# Altium PCB PCB3.PcbDoc
Units mil, origin at the board's own origin, x right, y up, seen from the top; angles counter-clockwise.
Board outline 2245 x 1690 mil, 2 copper layers (Top Layer, Bottom Layer); 6 components, 4 nets, 17 pads, 0 vias.
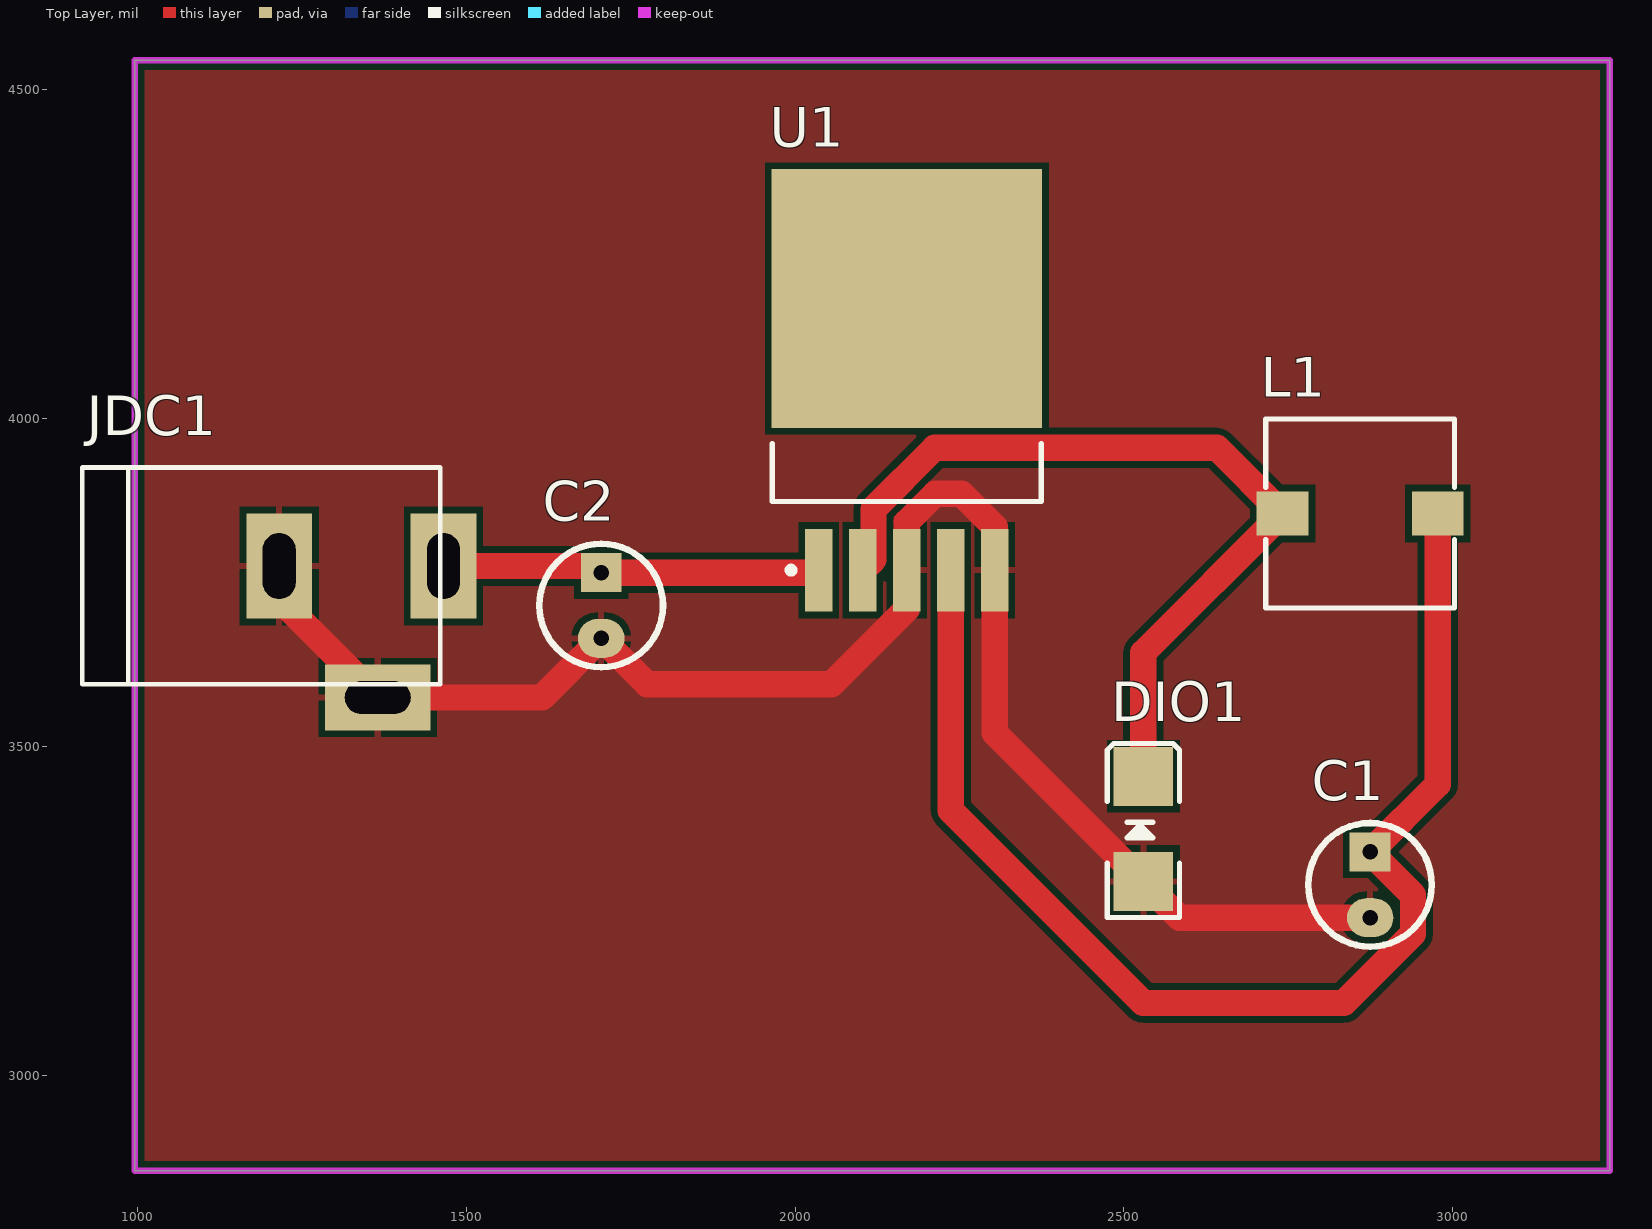
[diagram p0: Top Layer view]
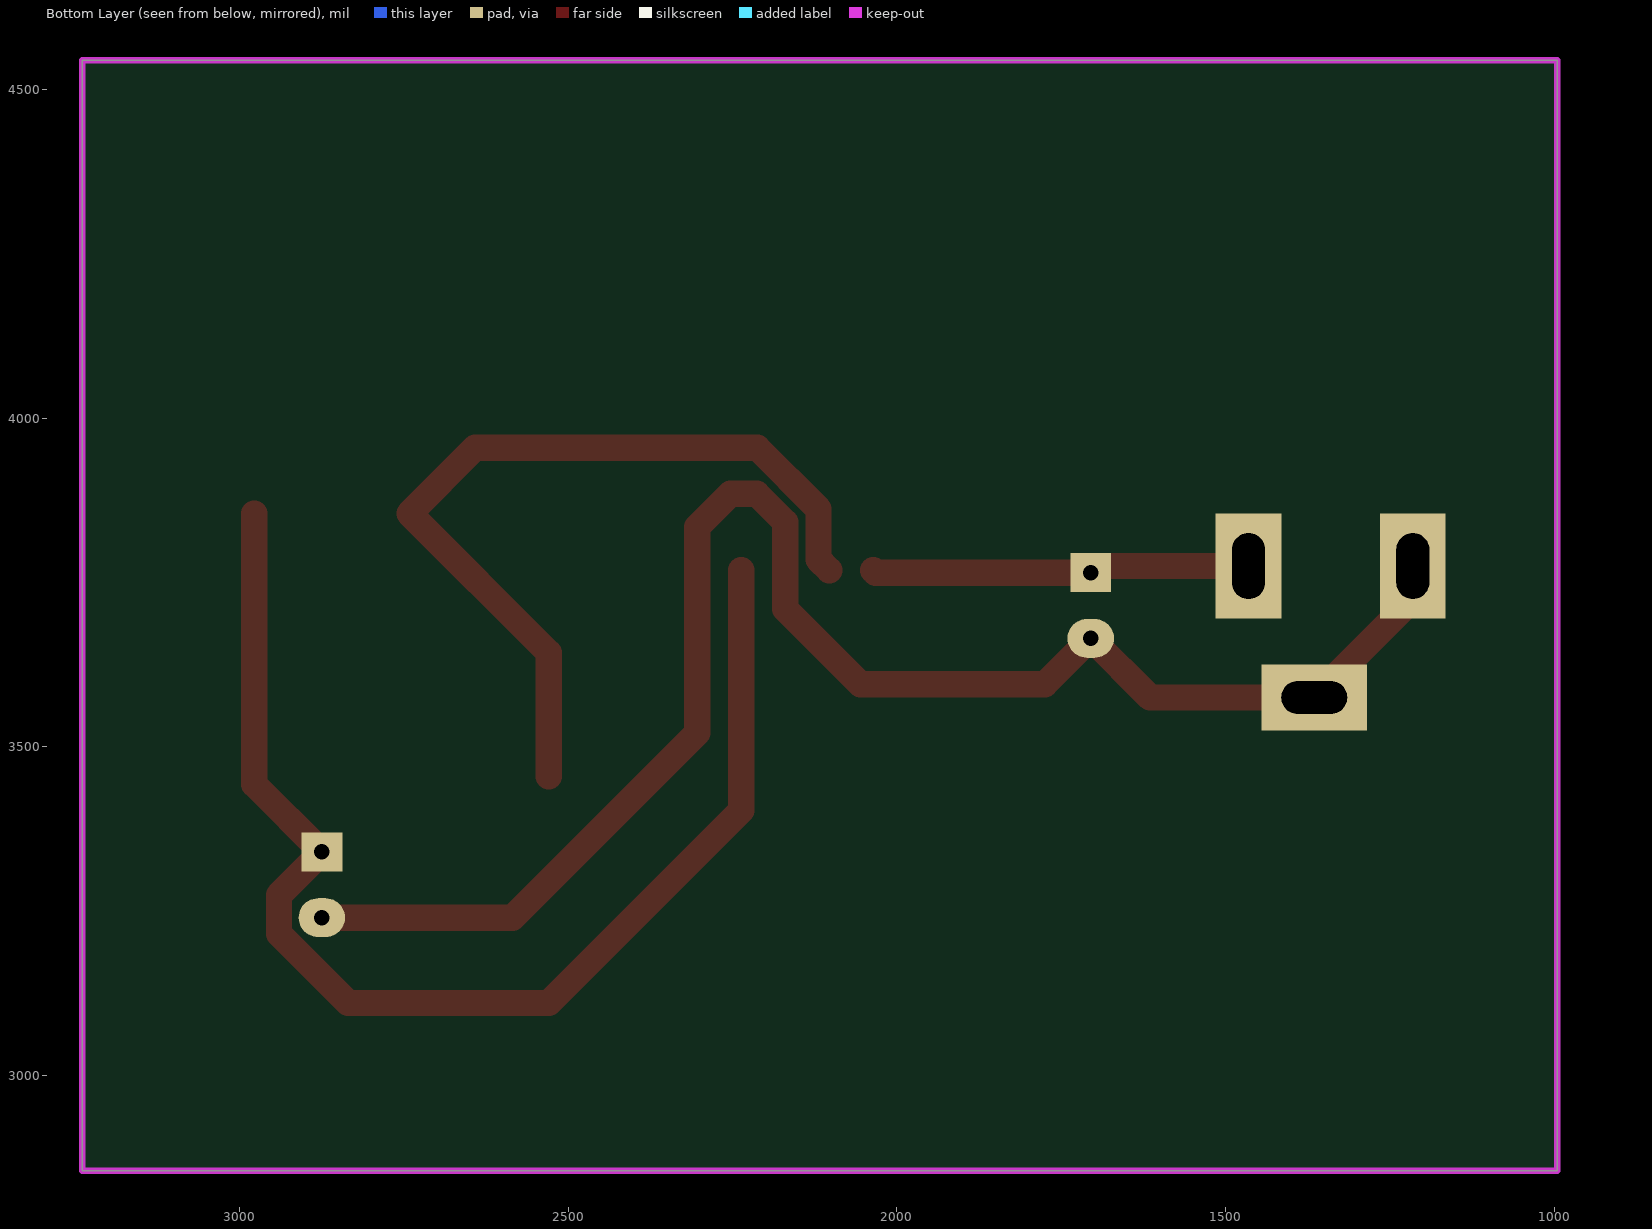
[diagram p1: Bottom Layer view, seen from below]
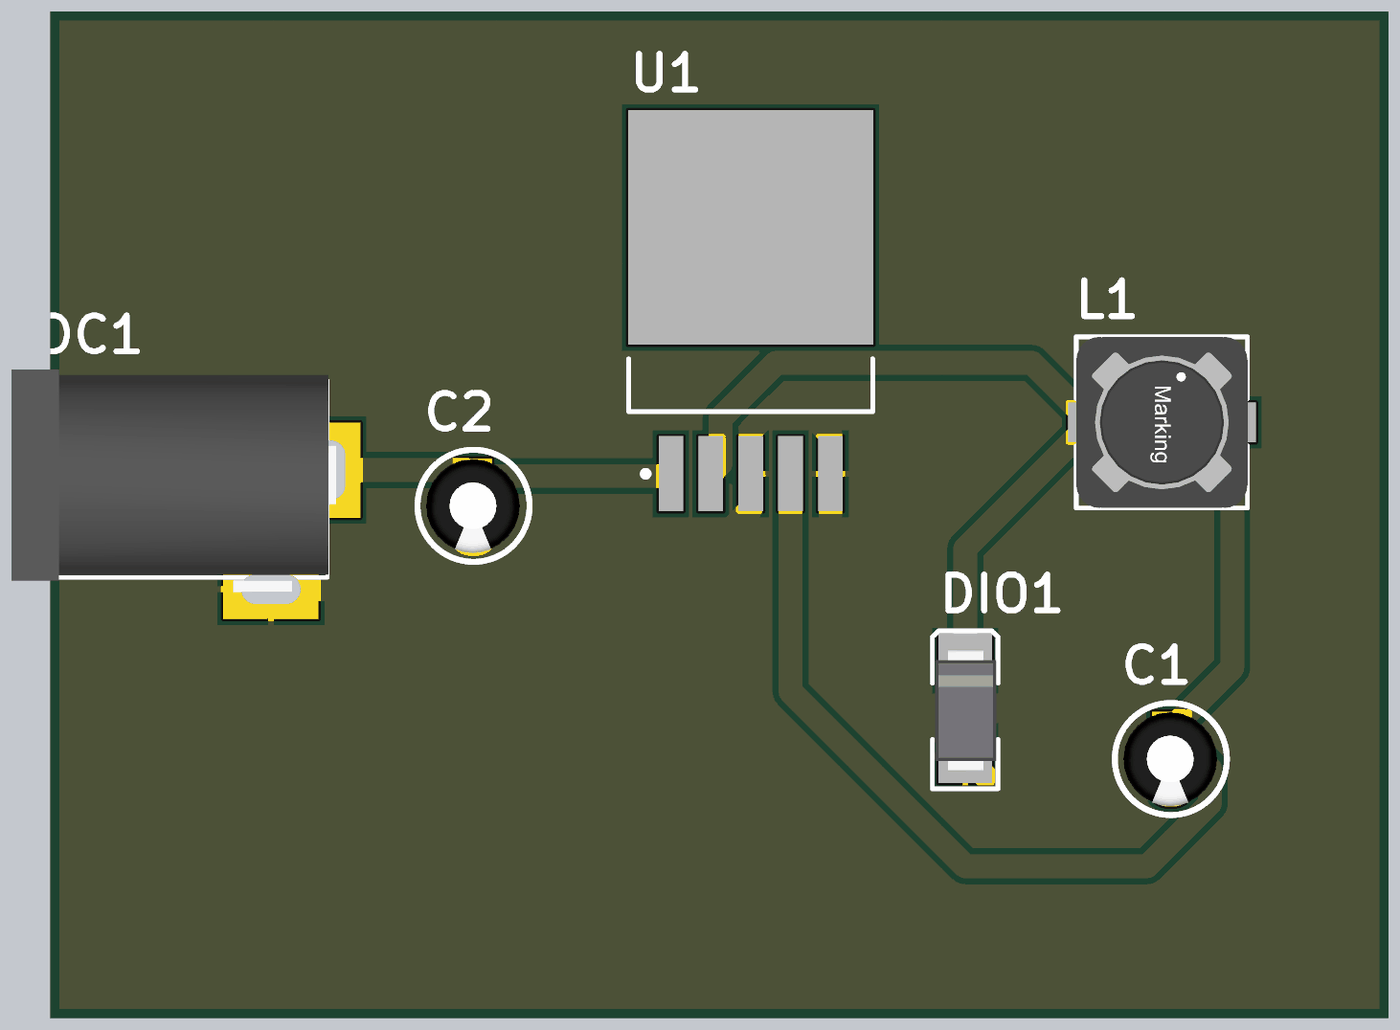
[diagram p2: 3D render of the assembled board from above, using the file's embedded part models]

## Layer stack, top to bottom
Top Solder: solder mask 0.4, Solder Resist, Dk 3.5
Top Layer: signal copper 1.4
Dielectric 1: dielectric 12.6, FR-4, Dk 4.8
Bottom Layer: signal copper 1.4
Bottom Solder: solder mask 0.4, Solder Resist, Dk 3.5

## Board outline
995,2855 3240,2855 3240,4545 995,4545

## Design rules (kind name [scope] priority, off if disabled: settings)
Clearance [All] p1: gap=10 ignorepadtopadclearanceinfootprint=TRUE
PolygonConnect [All] p1: connectstyle=Relief reliefconductorwidth=10 reliefentries=4 polygonreliefangle="90 Angle" airgapwidth=10
RoutingVias [All] p1: holewidth=28 width=50 viastyle="Through Hole" minholewidth=28 minwidth=50 maxholewidth=28 maxwidth=50
SolderMaskExpansion [All] p1: expansion=4
Width [All] p1: maxlimit=40 minlimit=15 preferedwidth=30
30 further rules are at their usual default settings.

## Components (designator, comment, footprint, x,y, rotation, side; value= is the part's Value field where it differs from the comment)
C1 "CAP-ALU-DIP" CA-ALU-2.54 2875,3290 r270 top value=104
C2 "CAP-ALU-DIP" CA-ALU-2.54 1705,3715 r270 top value=104
DIO1 "Diode SMD" DIO-SMD-106 2530,3375 r270 top value=1N5007
JDC1 "Jac DC" DC-IN 1340,3675 r0 top
L1 "150mH" L-SMD-M-7.3x4.5 2860,3855 r90 top value="150 mH"
U1 "LM2976" TO-263 2170,4005 r90 top

## Footprints (in the part's own frame and the unit in brackets; to place one, negate y for a bottom-side part, rotate by r counter-clockwise, add the part's x,y. Pads: shape width x height; smd on the part's side, far side on the other; paste and mask are expansions set on the pad)
CA-ALU-2.54 [mm]
  rect 1.5x1.58 hole 0.6: 1(-1.27,0)
  oval 1.5x1.8 hole 0.6: 2(1.27,0)
  silkscreen extent -2.39,-2.39 2.39,2.39, body extent -2,-2.03 1.99,1.97, height 7.01
DC-IN [mil] "Jac DC input"
  rect 100x160 hole 50 slot 100 at 90 deg: 1(125,100) 2(-125,100)
  rect 160x100 hole 50 slot 100 at 0 deg: 3(25,-100)
  silkscreen extent -425,-80 120,250, body extent -410,-105 134,269, height 434
DIO-SMD-106 [mil]
  rect 90x90.55 smd: 1(80,0) 2(-80,0)
  silkscreen extent -130,-55 135,55, body extent -99,-50 106,52, height 95
L-SMD-M-7.3x4.5 [mm] "WE-PDA SMD Shielded Power Inductor, 7345"
  rect 1.7x2 smd: 1(0,3) 2(0,-3)
  silkscreen extent -3.65,-3.65 3.65,3.65, body extent -3.65,-3.65 3.65,3.65, height 4.05
TO-263 [mm]
  rect 3.2x1.05 smd: 1(-6,3.4) 2(-6,1.7) 3(-6,0) 4(-6,-1.7) 5(-6,-3.4)
  rect 10x10.45 smd: 6(4.5,0)
  silkscreen extent -6.12,-5.2 -1.1,5.2, body extent -6.58,-5.2 7.57,5.2, height 4.65

## Part data
C1 C2: "Capacitor (Semiconductor SIM Model)", LatestRevisionDate=17-Jul-2002, LatestRevisionNote="Re-released for DXP Platform.", PackageReference=C1206, Publisher="Altium Limited"
DIO1: "Default Diode", Code - JEDEC=DO-214-AB, Published=8-Jun-2000, Publisher="Altium Limited", Revision="July-2002: Re-released for DXP Platform."
JDC1: library part DCIN, "Jac DC input"
L1: library part Inductor, "Inductor"
U1: library part LM2596, Max Input Voltage="12 V", Max Output Current="3 (6.0 peak) A", Max Output Voltage=mV, Temperature Range="-40 to +125 degC", Category=IC-Power, Min Input Voltage=mV, Min Output Voltage=mV, Mounting Technology="Surface Mount", Status=Unreleased, Supply Voltage=mV

## Nets (pads, with @x,y where several pads share a name; then routed paths per layer and width w, separated by ;. In a path a pad name is that pad's centre, name@x,y a point inside that pad or via, vN(x,y) a via of type N, cw(c..) or ccw(c..) an arc to the next point about the centre after c; other vN are vias at no path point)
+5: C1.1 L1.2 U1.4 | length 1943.7
  Top Layer w40: U1.4 2236.93,3403.07 2530,3110 2835.09,3110 2940.43,3215.34 2940.43,3274.57 C1.1 2978.11,3443.11 L1.2
+12: C2.1 JDC1.1 U1.1 | length 576.8
  Top Layer w40: JDC1.1 1695,3775 C2.1 2032.36,3765 U1.1
GND: C1.2 C2.2 DIO1.1 JDC1.2 JDC1.3 U1.3 U1.5 | length 2486.6
  Top Layer w40: JDC1.2 1215,3725 JDC1.3 1615,3575 C2.2 1775,3595 2055.38,3595 2170,3709.62 U1.3 2170,3841.73 2213.27,3885 2253.27,3885 2303.86,3834.41 U1.5 2303.86,3521.14 DIO1.1 2585,3240 C1.2
NetDIO1_2: DIO1.2 L1.1 U1.2 | length 1290.1
  Top Layer w40: U1.2 2119.33,3785.04 2119.33,3861.77 2212.56,3955 2641.89,3955 L1.1 2530,3643.11 DIO1.2
pads on no net: U1.6

## Polygon pours and split planes (outlines as drawn)
GND on Top Layer (solid, remove dead copper, pour order 2): 995,4545 3240,4545 3230,4535 3230,2855 995,2855

## Keep-outs
Keep-Out Layer:
  the board outline again, w10